# Altium PCB PCB.PcbDoc
Units mm, origin at the board's own origin, x right, y up, seen from the top; angles counter-clockwise.
Board outline 200 x 100 mm, 2 copper layers (Top Layer, Bottom Layer); 76 components, 73 nets, 347 pads, 74 vias.
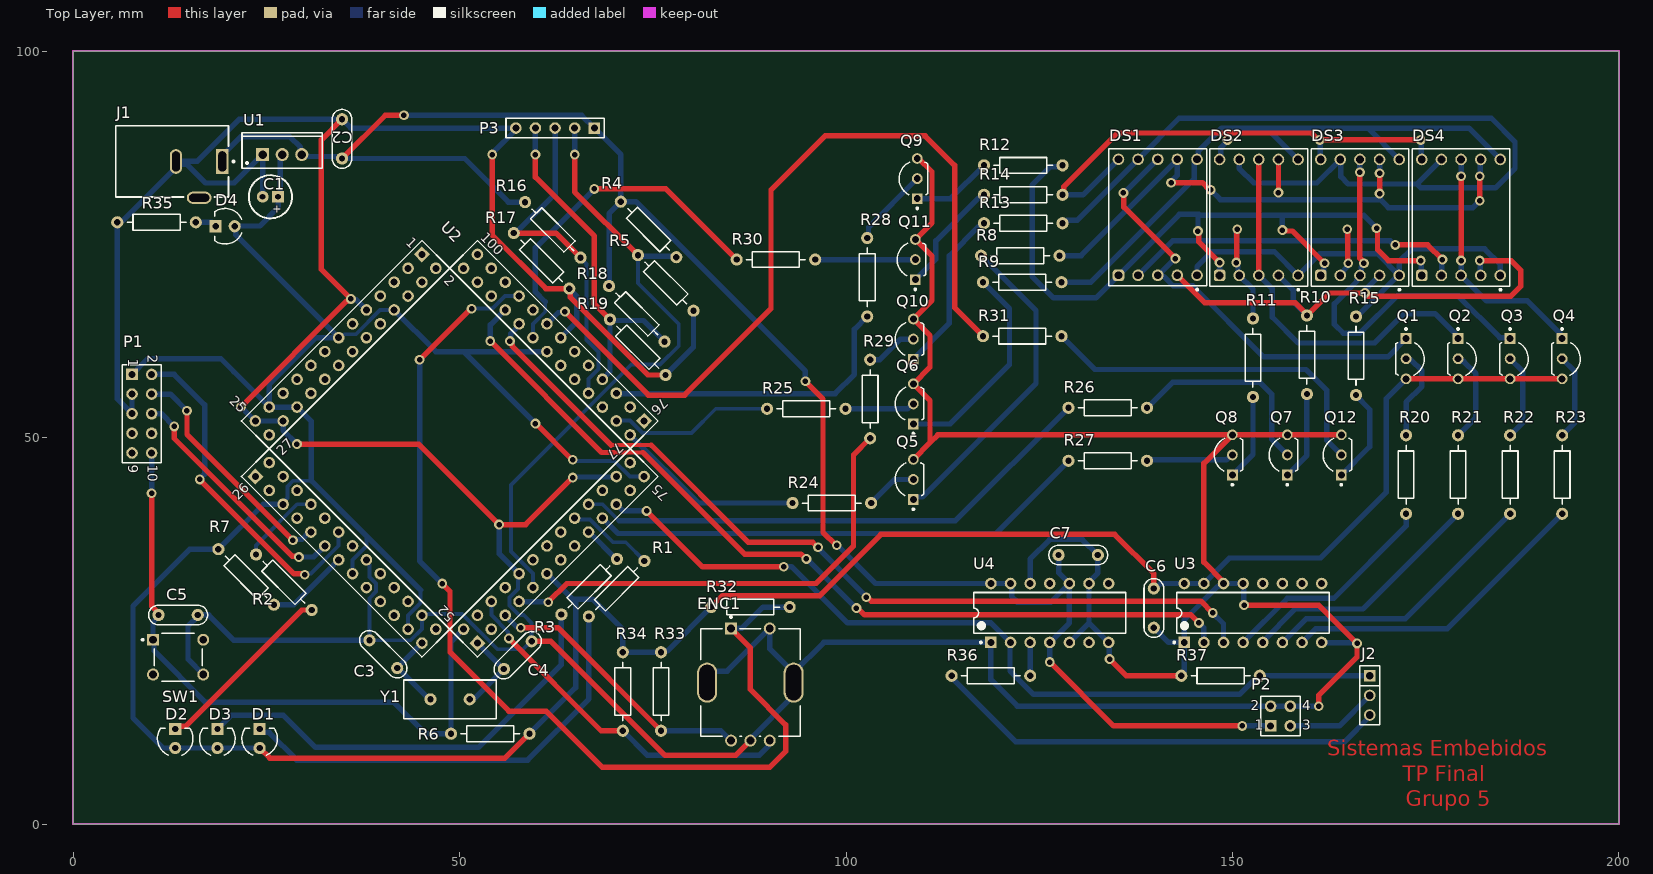
[diagram p0: Top Layer view]
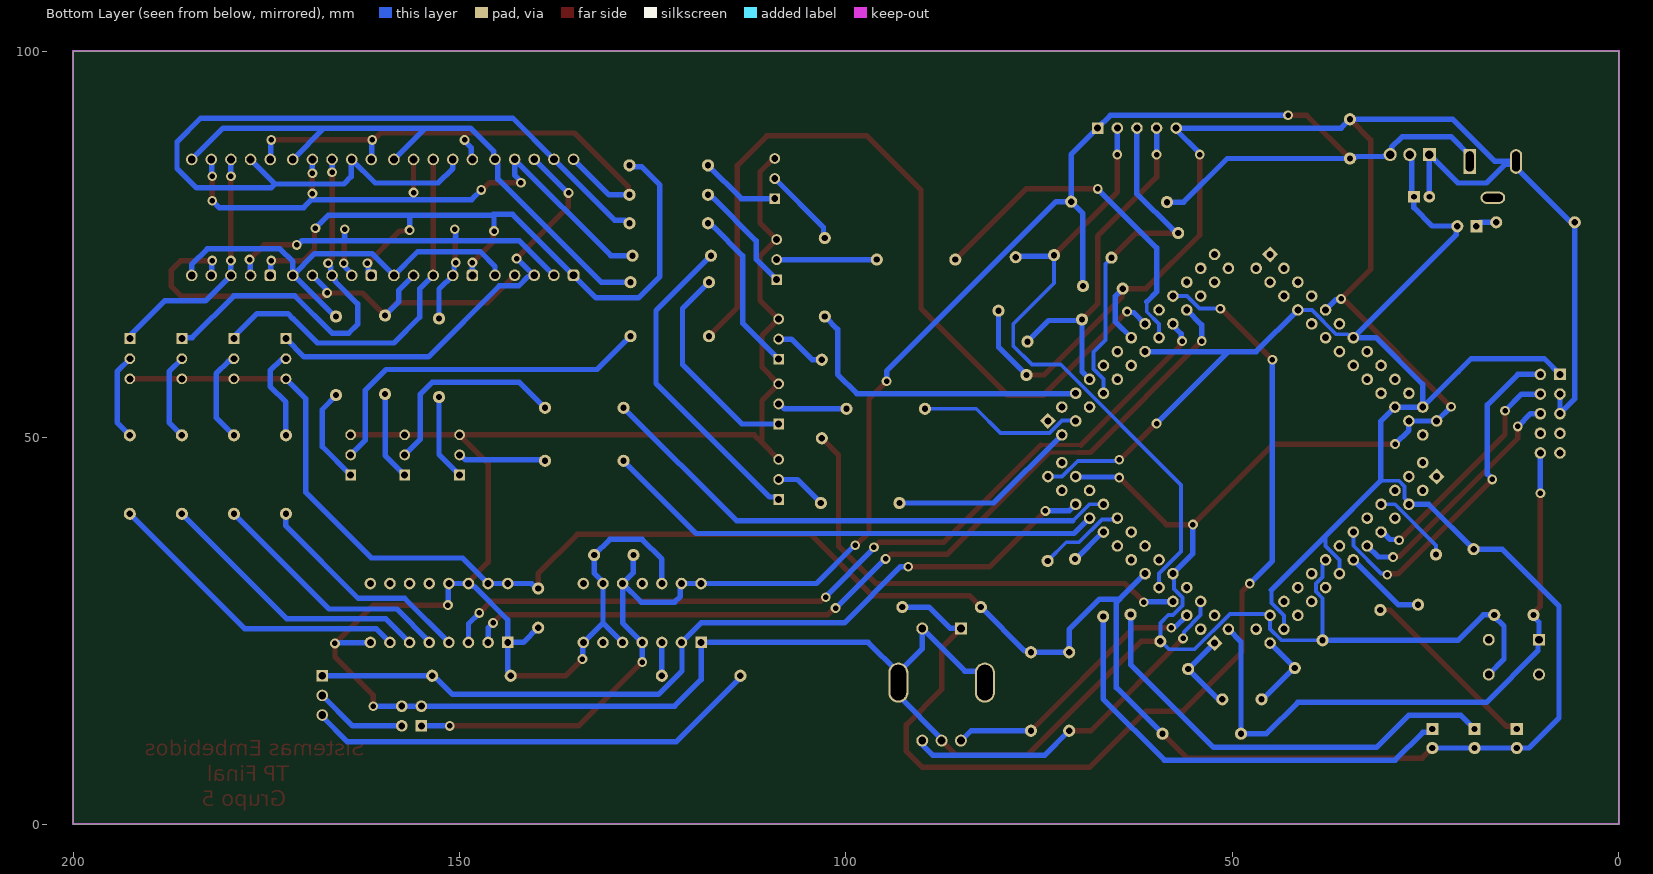
[diagram p1: Bottom Layer view, seen from below]
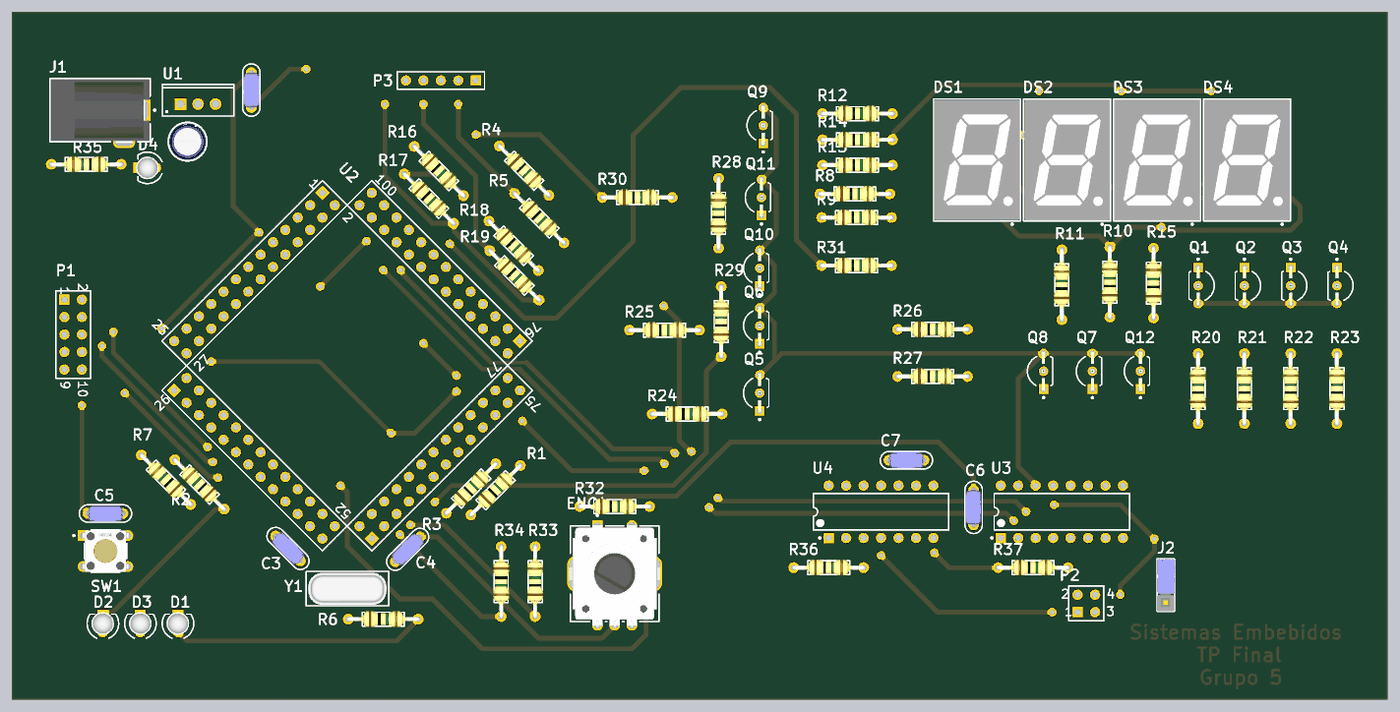
[diagram p2: 3D render of the assembled board from above, using the file's embedded part models]

## Layer stack, top to bottom
Top Solder: solder mask 0.0102, Solder Resist, Dk 3.5
Top Layer: signal copper 0.0356
Dielectric 1: dielectric 0.32, FR-4, Dk 4.8
Bottom Layer: signal copper 0.0356
Bottom Solder: solder mask 0.0102, Solder Resist, Dk 3.5

## Board outline
0,0 0,100 200,100 200,0

## Design rules (kind name [scope] priority, off if disabled: settings)
Clearance [All] p1: gap=0.25 ignorepadtopadclearanceinfootprint=FALSE
PolygonConnect [All] p1: connectstyle=Relief reliefconductorwidth=0.254 reliefentries=4 polygonreliefangle="90 Angle" airgapwidth=0.254
RoutingVias [All] p1: holewidth=0.711 width=1.27 viastyle="Through Hole" minholewidth=0.711 minwidth=1.27 maxholewidth=0.711 maxwidth=1.27
SolderMaskExpansion [All] p1: expansion=0.102 istentingtop=FALSE
Width [All] p1: maxlimit=1 minlimit=0.5 preferedwidth=0.7
30 further rules are at their usual default settings.

## Classes and differential pairs
component class Esquematico: C1 C2 C3 C4 C5 C7 D1 D2 D3 D4 ENC1 J1 J2 P1 P2 P3 R1 R2 R3 R4 R5 R6 R7 R16 R17 R18 R19 R34 R35 SW1 U1 U2 U4 Y1
component class Control_Acceso: DS1 DS2 DS3 DS4 Q1 Q2 Q3 Q4 Q5 Q6 Q7 Q8 Q9 Q10 Q11 Q12 R8 R9 R10 R11 R12 R13 R14 R15 R20 R21 R22 R23 R24 R25 R26 R27 R28 R29 R31 U3

## Components (designator, comment, footprint, x,y, rotation, side; value= is the part's Value field where it differs from the comment)
C1 "10uF" CAP100RP 25.527,81.153 r180 top
C2 "100nF" CAP200 34.798,88.646 r90 top
C3 "22pF" CAP200 40.132,21.971 r135 top
C4 "22pF" CAP200 57.531,21.844 r45 top
C5 "100nF" CAP200 13.589,27.051 r0 top
C6 "100nF" CAP200 139.827,27.94 r270 top
C7 "100nF" CAP200 130.048,34.798 r0 top
D1 "" LED3 24.13,11.049 r90 top
D2 "" LED3 13.208,11.049 r90 top
D3 "" LED3 18.669,11.049 r90 top
D4 "" LED3 19.685,77.343 r180 top
DS1 "" WL-T7DS_L17.5W12.4H7 140.335,78.493 r0 top
DS2 "" WL-T7DS_L17.5W12.4H7 153.416,78.479 r0 top
DS3 "" WL-T7DS_L17.5W12.4H7 166.497,78.479 r0 top
DS4 "" WL-T7DS_L17.5W12.4H7 179.578,78.479 r0 top
ENC1 "PEC12R-3217F-S0024" FP-PEC12R-3217F-S0024-MFG 87.63,18.295 r0 top
J1 "PJ-102A" FP-PJ-102A-MFG 12.804,85.725 r90 top
J2 "JUMPER" JUMPER3 167.767,16.637 r270 top
P1 "Header 5X2" HDR2X5 7.62,58.166 r270 top
P2 "Header 2X2" HDR2X2 154.94,12.7 r0 top
P3 "Header 5" HDR1X5 67.437,90.043 r180 top
Q1 "BC327" ONSC-TO-92-3-29-11_AM_BL 172.466,60.198 r270 top
Q2 "BC327" ONSC-TO-92-3-29-11_AM_BL 179.197,60.198 r270 top
Q3 "BC327" ONSC-TO-92-3-29-11_AM_BL 185.928,60.198 r270 top
Q4 "BC327" ONSC-TO-92-3-29-11_AM_BL 192.659,60.198 r270 top
Q5 "BC337" ONSC-TO-92-3-29-11_AM_BL 108.712,44.577 r90 top
Q6 "BC337" ONSC-TO-92-3-29-11_AM_BL 108.712,54.356 r90 top
Q7 "BC337" ONSC-TO-92-3-29-11_AM_BL 157.099,47.752 r90 top
Q8 "BC337" ONSC-TO-92-3-29-11_AM_BL 149.987,47.752 r90 top
Q9 "BC337" ONSC-TO-92-3-29-11_AM_BL 109.22,83.506 r90 top
Q10 "BC337" ONSC-TO-92-3-29-11_AM_BL 108.712,62.738 r90 top
Q11 "BC337" ONSC-TO-92-3-29-11_AM_BL 108.966,73.025 r90 top
Q12 "BC337" ONSC-TO-92-3-29-11_AM_BL 164.084,47.752 r90 top
R1 "330" RES400 66.73,26.852 r45 top
R2 "330" RES400 30.861,27.686 r135 top
R3 "330" RES400 63.174,27.106 r45 top
R4 "1k" RES400 70.866,80.518 r315 top
R5 "2.2k" RES400 73.08,73.605 r315 top
R6 "10k" RES400 48.895,11.684 r0 top
R7 "10k" RES400 25.98,28.376 r135 top
R8 "68" RES400 117.475,73.533 r0 top
R9 "68" RES400 117.729,70.104 r0 top
R10 "68" RES400 159.639,55.626 r90 top
R11 "68" RES400 152.654,55.245 r90 top
R12 "68" RES400 117.856,85.217 r0 top
R13 "68" RES400 117.856,77.724 r0 top
R14 "68" RES400 117.856,81.407 r0 top
R15 "68" RES400 165.989,55.499 r90 top
R16 "1k" RES400 58.475,80.463 r315 top
R17 "2.2k" RES400 57.023,76.454 r315 top
R18 "1k" RES400 69.342,69.596 r315 top
R19 "2.2k" RES400 69.469,65.278 r315 top
R20 "4.7K" RES400 172.466,40.132 r90 top
R21 "4.7K" RES400 179.197,40.133 r90 top
R22 "4.7K" RES400 185.928,40.132 r90 top
R23 "4.7K" RES400 192.659,40.132 r90 top
R24 "4.7K" RES400 93.091,41.529 r0 top
R25 "4.7K" RES400 89.789,53.721 r0 top
R26 "4.7K" RES400 128.778,53.848 r0 top
R27 "4.7K" RES400 128.778,46.99 r0 top
R28 "4.7K" RES400 102.743,65.659 r90 top
R29 "4.7K" RES400 103.124,49.911 r90 top
R30 "4.7K" RES400 85.852,73.025 r0 top
R31 "4.7K" RES400 117.729,63.119 r0 top
R32 "10k" RES400 82.55,28.067 r0 top
R33 "10k" RES400 76.073,12.065 r90 top
R34 "10k" RES400 71.12,22.225 r270 top
R35 "1k" RES400 15.875,77.851 r180 top
R36 "470" RES400 113.665,19.177 r0 top
R37 "4.7K" RES400 143.383,19.177 r0 top
SW1 "" FP-B3F-1055-MFG 13.589,21.59 r0 top
U1 "LD1117V33" TO220 27.051,86.614 r0 top
U2 "K64 Breakout Module" Breakout 49.008,48.673 r315 top
U3 "SN74HC139N" N0016A 152.654,27.305 r90 top
U4 "" N0014A 126.365,27.305 r90 top
Y1 "50MHz" "CRISTAL PERFIL" 46.228,16.129 r0 top

## Footprints (in the part's own frame and the unit in brackets; to place one, negate y for a bottom-side part, rotate by r counter-clockwise, add the part's x,y. Pads: shape width x height; smd on the part's side, far side on the other; paste and mask are expansions set on the pad)
Breakout [mm]
  rect 1.5x1.5 hole 0.9: 1(-20.433,14.954) 27(-15.353,-20.606) 53(20.207,-15.526) 79(15.127,20.034)
  round 1.5 hole 0.9: 2(-17.893,14.954) 3(-20.433,12.414) 4(-17.893,12.414) 5(-20.433,9.874) 6(-17.893,9.874) 7(-20.433,7.334) 8(-17.893,7.334) 9(-20.433,4.794) 10(-17.893,4.794) 11(-20.433,2.254) 12(-17.893,2.254) 13(-20.433,-0.286) 14(-17.893,-0.286) 15(-20.433,-2.826) 16(-17.893,-2.826) 17(-20.433,-5.366) 18(-17.893,-5.366) 19(-20.433,-7.906) 20(-17.893,-7.906) 21(-20.433,-10.446) 22(-17.893,-10.446) 23(-20.433,-12.986) 24(-17.893,-12.986) 25(-20.433,-15.526) 26(-17.893,-15.526) 28(-15.353,-18.066) 29(-12.813,-20.606) 30(-12.813,-18.066) 31(-10.273,-20.606) 32(-10.273,-18.066) 33(-7.733,-20.606) 34(-7.733,-18.066) 35(-5.193,-20.606) 36(-5.193,-18.066) 37(-2.653,-20.606) 38(-2.653,-18.066) 39(-0.113,-20.606) 40(-0.113,-18.066) 41(2.427,-20.606) 42(2.427,-18.066) 43(4.967,-20.606) 44(4.967,-18.066) 45(7.507,-20.606) 46(7.507,-18.066) 47(10.047,-20.606) 48(10.047,-18.066) 49(12.587,-20.606) 50(12.587,-18.066) 51(15.127,-20.606) 52(15.127,-18.066) 54(17.667,-15.526) 55(20.207,-12.986) 56(17.667,-12.986) 57(20.207,-10.446) 58(17.667,-10.446) 59(20.207,-7.906) 60(17.667,-7.906) 61(20.207,-5.366) 62(17.667,-5.366) 63(20.207,-2.826) 64(17.667,-2.826) 65(20.207,-0.286) 66(17.667,-0.286) 67(20.207,2.254) 68(17.667,2.254) 69(20.207,4.794) 70(17.667,4.794) 71(20.207,7.334) 72(17.667,7.334) 73(20.207,9.874) 74(17.667,9.874) 75(20.207,12.414) 76(17.667,12.414) 77(20.207,14.954) 78(17.667,14.954) 80(15.127,17.494) 81(12.587,20.034) 82(12.587,17.494) 83(10.047,20.034) 84(10.047,17.494) 85(7.507,20.034) 86(7.507,17.494) 87(4.967,20.034) 88(4.967,17.494) 89(2.427,20.034) 90(2.427,17.494) 91(-0.113,20.034) 92(-0.113,17.494) 93(-2.653,20.034) 94(-2.653,17.494) 95(-5.193,20.034) 96(-5.193,17.494) 97(-7.733,20.034) 98(-7.733,17.494) 99(-10.273,20.034) 100(-10.273,17.494) 101(-12.813,20.034) 102(-12.813,17.494) 103(-15.353,20.034) 104(-15.353,17.494)
  silkscreen extent -21.7,-21.88 21.48,21.3
CAP100RP [mil] "Body diameter 5mm"
  rect 60x60 hole 30: 1(-39.37,0)
  round 60 hole 30: 2(39.37,0)
  silkscreen extent -110,-110 110,110, body extent -99,-99 99,100, height 454
CAP200 [mil]
  round 62 hole 32: 1(-100,0) 2(100,0)
  silkscreen extent -150,-50 150,50, body extent -110,-46 110,44, height 246
"CRISTAL PERFIL" [mil]
  round 62 hole 32: 1(0,0) 2(200,0)
  silkscreen extent -136,-98 336,98, body extent -123,-93 323,90, height 138
FP-B3F-1055-MFG [mm]
  rect 1.55x1.55 hole 1 paste-2539.97 mask+0: 1(-3.25,2.25)
  round 1.55 hole 1 paste-2539.97 mask+0: 2(3.25,2.25) 3(-3.25,-2.25) 4(3.25,-2.25)
  silkscreen extent -4.72,-3.1 3.1,3.1, body extent -4.13,-3.2 4.13,3.2, height 0.25
FP-PEC12R-3217F-S0024-MFG [mm]
  rect 1.55x1.55 hole 1 paste-2539.97 mask+0: 1(-2.5,7)
  round 1.55 hole 1 paste-2539.97 mask+0: 2(2.5,7) A(-2.5,-7.5) B(2.5,-7.5) C(0,-7.5)
  rrect100% 2.6x5.2 hole 4.6 slot 2 at 0 deg paste-2539.97 mask+0: 3(-5.6,0) 4(5.6,0)
  silkscreen extent -6.45,-6.95 6.45,8.6, body extent -7,-8.37 7,7.88, height 0.25
FP-PJ-102A-MFG [mm]
  rect 3.2x1.6 hole 1 slot 2.6 at 0 deg paste-2539.97 mask+0: 1(0,-6.5)
  rrect100% 3.2x1.6 hole 1 slot 2.6 at 0 deg paste-2539.97 mask+0: 2(0,-0.5)
  rrect100% 1.6x3.2 hole 2.6 slot 1 at 0 deg paste-2539.97 mask+0: 3(-4.7,-3.5)
  silkscreen extent -4.6,-8.08 4.6,7.3, body extent -5.6,-7.4 4.7,7.4, height 0.25
HDR1X5 [mm] "Connector; Header; 5 Position"
  rect 1.5x1.5 hole 0.9: 1(0,0)
  round 1.5 hole 0.9: 2(2.54,0) 3(5.08,0) 4(7.62,0) 5(10.16,0)
  silkscreen extent -1.27,-1.27 11.43,1.27
HDR2X2 [mm] "Connector; Header; 2x2 Position"
  rect 1.5x1.5 hole 0.9: 1(0,0)
  round 1.5 hole 0.9: 2(0,2.54) 3(2.54,0) 4(2.54,2.54)
  silkscreen extent -1.27,-1.27 3.81,3.81
HDR2X5 [mm] "Connector; Header; 5x2 Position"
  rect 1.5x1.5 hole 0.9: 1(0,0)
  round 1.5 hole 0.9: 2(0,2.54) 3(2.54,0) 4(2.54,2.54) 5(5.08,0) 6(5.08,2.54) 7(7.62,0) 8(7.62,2.54) 9(10.16,0) 10(10.16,2.54)
  silkscreen extent -1.27,-1.27 11.43,3.81
JUMPER3 [mm]
  rect 1.5x1.5 hole 1.016: 1(-2.54,0)
  round 1.5 hole 1.016: 2(0,0) 3(2.54,0)
  silkscreen extent -3.81,-1.27 3.81,1.27, body extent -3.81,-1.3 3.81,1.27, height 16.15
LED3 [mil]
  round 62 hole 32: 1(-48,0)
  rect 62x62 hole 32: 2(49,0)
  silkscreen extent -84,-90 54,90, body extent -65,-64 65,65, height 19
N0014A [mm] "DIP, 14-Leads, Body 19.7x6.6mm, Pitch 2.54mm"
  rect 1.5x1.5 hole 0.9: 1(-3.81,7.62)
  round 1.5 hole 0.9: 2(-3.81,5.08) 3(-3.81,2.54) 4(-3.81,0) 5(-3.81,-2.54) 6(-3.81,-5.08) 7(-3.81,-7.62) 8(3.81,-7.62) 9(3.81,-5.08) 10(3.81,-2.54) 11(3.81,0) 12(3.81,2.54) 13(3.81,5.08) 14(3.81,7.62)
  silkscreen extent -3.93,-9.85 2.65,9.85, body extent -3.95,-9.85 3.95,9.85, height 5.08
N0016A [mm] "DIP, 16-Leads, Body 19.7x6.6mm, Pitch 2.54mm"
  rect 1.5x1.5 hole 0.9: 1(-3.81,8.89)
  round 1.5 hole 0.9: 2(-3.81,6.35) 3(-3.81,3.81) 4(-3.81,1.27) 5(-3.81,-1.27) 6(-3.81,-3.81) 7(-3.81,-6.35) 8(-3.81,-8.89) 9(3.81,-8.89) 10(3.81,-6.35) 11(3.81,-3.81) 12(3.81,-1.27) 13(3.81,1.27) 14(3.81,3.81) 15(3.81,6.35) 16(3.81,8.89)
  silkscreen extent -3.93,-9.85 2.65,10.31, body extent -3.95,-9.85 3.95,9.85, height 5.08
ONSC-TO-92-3-29-11_AM_BL [mm] "TO, 3-Leads, Body Dia 4.7mm, Pitch 2.6mm"
  rect 1.4x1.4 hole 0.9: 1(-2.6,0)
  round 1.4 hole 0.9: 2(0,0) 3(2.6,0)
  silkscreen extent -3.97,-1.34 2.13,2.35, body extent -2.84,-1.34 2.84,2.35, height 5.33
RES400 [mil]
  round 62 hole 32: 1(0,0) 2(400,0)
  silkscreen extent 50,-40 350,40, body extent -12,-45 412,46, height 96
TO220 [mm] "TO, Thru-Hole, Vertical, Heatsink Mounted; 3 In-Line Leads; Pitch 2.54 mm"
  rect 1.7x1.7 hole 1.1: 1(-2.54,0)
  round 1.7 hole 1.1: 2(0,0) 3(2.54,0)
  silkscreen extent -5.2,-1.75 5.2,2.85, body extent -5.25,-1.8 5.25,2.9, height 19.7
WL-T7DS_L17.5W12.4H7 [mm] "7 Segments Display THT Single Digit , body 12.4x17.5mm"
  rrect50% 1.5x1.5 hole 1: 1(-5.08,-7.5)
  round 1.5 hole 1: 2(-2.54,-7.5) 3(0,-7.5) 4(2.54,-7.5) 5(5.08,-7.5) 6(5.08,7.5) 7(2.54,7.5) 8(0,7.5) 9(-2.54,7.5) 10(-5.08,7.5)
  silkscreen extent -6.32,-9.47 6.32,8.87, body extent -6.2,-8.75 6.2,8.75, height 7.1

## Part data
C1: library part CAPPOL
C2 C3 C4 C5 C6 C7: library part CAP
D1 D2 D3 D4: library part LED
DS1 DS2 DS3 DS4: library part CMP-03913-119893999-3, "7-Seg Display, Comm Anode, Super Red Rohs Compliant: Yes", Forward Current=100mA, Forward Voltage=2V, Max Operating Temperature=85°C, Max Reverse Voltage (DC)=5V, Min Operating Temperature=-40°C, Dominant Wavelength=635nm, Height=7mm, Length=17.5mm, Luminous Intensity=20mcd, RoHS=Compliant, Width=12.4mm
ENC1: library part CMP-07421-000063-1, "ROTARY ENCODER", Height=13.4mm, Length=23mm, RoHS Compliant=Yes, Width=12.5mm
J1: library part CMP-12637-106234071-1, "PJ-102A 2.0 x 6.5 mm, 2.5 A, Horizontal, Through Hole, Tapered Pins, Dc Power Jack Connector", Color=Black, Current Rating=2.5A, Flammability Rating="UL94 V-0", Insulation Resistance=50MΩ, Max Operating Temperature=85°C, Min Operating Temperature=-25°C, Voltage Rating=24V, Contact Gender=Male, Contact Material="Copper, Nickel, Tin", Contact Plating=Nickel, Diameter=2.1mm, Gender=Male, Height=11.2mm, Housing Color=Black, Housing Material=Thermoplastic, Inside Diameter=2mm, Lead Free="Lead Free", Lifecycle Status=Production, Mount="Through Hole", NexarPartId=106234071, Number of Conductors=2, Number of Contacts=3, Orientation=Horizontal, Outside Diameter=6.5mm, Packaging=Bulk, RoHS=Compliant, Schedule B="8536695050, 8536695050", Shielding=No, Termination="Through Hole", Voltage Rating (DC)=24V
J2: library part JUMPER3
P1: "Header, 5-Pin, Dual row", LatestRevisionDate=17-Jul-2002, LatestRevisionNote="Re-released for DXP Platform.", Publisher="Altium Limited"
P2: "Header, 2-Pin, Dual row", LatestRevisionDate=17-Jul-2002, LatestRevisionNote="Re-released for DXP Platform.", Publisher="Altium Limited"
P3: "Header, 5-Pin", LatestRevisionDate=17-Jul-2002, LatestRevisionNote="Re-released for DXP Platform.", Publisher="Altium Limited"
Q1 Q2 Q3 Q4: library part CMP-1048-01577-1, "Amplifier Transistor, PNP Silicon, 3-Pin TO-92, Pb-Free, Ammo Box", Manufacturer="On Semiconductor", PartNumber=BC327-25ZL1G, ComponentLink1Description="Manufacturer URL", ComponentLink1URL=http://www.onsemi.com/, ComponentLink2Description=Datasheet, ComponentLink2URL=http://www.onsemi.com/pub_link/Collateral/BC327-D.PDF, ComponentLink3Description="Package Specification", ComponentLink3URL=http://www.onsemi.com/pub_link/Collateral/MAC97-D.PDF, DatasheetVersion="Rev. 6", IC Continuous (A)=-0.8, Mounting Technology="Through Hole", PackageDescription="3-Pin Transistor Outline, Body 4.825 x 3.685 mm, Pitch 1.27 mm", PackageReference=TO-92-3-29-11_AM_BL, PackageVersion="Rev. AM", Packing="Ammo Box", Polarity=PNP, RoHS=TRUE
Q5 Q6 Q7 Q8 Q9 Q10 Q11 Q12: library part CMP-1048-01583-1, "Amplifier Transistor, NPN Silicon, 3-Pin TO-92, Pb-Free, Ammo Box", Manufacturer="On Semiconductor", PartNumber=BC337-40ZL1G, ComponentLink1Description="Manufacturer URL", ComponentLink1URL=http://www.onsemi.com/, ComponentLink2Description=Datasheet, ComponentLink2URL=http://www.onsemi.com/pub_link/Collateral/BC337-D.PDF, ComponentLink3Description="Package Specification", ComponentLink3URL=http://www.onsemi.com/pub_link/Collateral/MAC97-D.PDF, DatasheetVersion="Rev. 8", IC Continuous (A)=0.8, Mounting Technology="Through Hole", PackageDescription="3-Pin Transistor Outline, Body 4.825 x 3.685 mm, Pitch 1.27 mm", PackageReference=TO-92-3-29-11_AM_BL, PackageVersion="Rev. AM", Packing="Ammo Box", Polarity=NPN, RoHS=TRUE
R1 R2 R3 R4 R5 R6 R7 R8 R9 R10 R11 R12 R13 R14 R15 R16 R17 R18 R19 R20 R21 R22 R23 R24 R25 R26 R27 R28 R29 R30 R31 R32 R33 R34 R35 R36 R37: library part RES
SW1: library part CMP-08834-000061-1, "SWITCH TACTILE SPST-NO 0.05A 24V", Actuator Color=Orange, Contact Current Rating=50mA, Contact Resistance=100mR, Max Operating Temperature=70°C, Max Voltage Rating (DC)=24V, Min Operating Temperature=-25°C, Operating Force=2.55N, Package Quantity=1500, Actuator Length=3mm, Contact Material=Gold, Contact Plating=Silver, Contact Type="1 maker", Current Rating=50mA, Depth=6mm, Electrical Life=300000Cycles, Height=7.3mm, Illumination Type=Non-Illuminated, Lead Free="Lead Free", Length=6mm, Max Current Rating=50mA, Mechanical Life=100000Cycles, Mount="Through Hole", Number of Poles=1, Orientation=Straight, Packaging=Bag, RoHS Compliant=Yes, Series=B3F, Switch Function=Off-Mom, Switch Travel=0.25mm, Termination="PC Pins", Throw Configuration=SPST, Voltage Rating (DC)=24V, Weight=0.25g, Width=6mm
U1: library part CMP-0244-00470-1, "Fixed Low Drop Positive Voltage Regulator, 3.3V, 3-Pin TO-220", ComponentLink1Description="Manufacturer URL", ComponentLink1URL=http://www.st.com, ComponentLink2Description=Datasheet, ComponentLink2URL=http://www.st.com/internet/com/TECHNICAL_RESOURCES/TECHNICAL_LITERATURE/DATASHEET/CD00000544.pdf, ComponentLink3Description="Package Specification", ComponentLink3URL=http://www.st.com/internet/com/TECHNICAL_RESOURCES/TECHNICAL_LITERATURE/PACKAGE_INFORMATION/CD00004649.pdf, DatasheetVersion=1/11/2011, PackageDescription="TO, Thru-Hole, Vertical, Heatsink Mounted; 3 In-Line Leads; Pitch 2.54 mm", PackageReference=TO220, PackageVersion=ver3.0
U2: library part Breakout
U3: library part CMP-1633-00660-2, "Dual 2-Line To 4-Line Decoders/Demultiplexers, N0016A, TUBE", F @ Nom Voltage(Max)(Mhz)=28, Generic Part Number=SN74HC139, ICC @ Nom Voltage(Max)(mA)=0.08, Manufacturer="Texas Instruments", Operating Temperature Range(C)="-40 to 85", Rating=Catalog, tpd @ Nom Voltage(Max)(ns)=44, Voltage(Nom)(V)=3.3,5, Bits(#)=4, Channels(#)=2, Code_JEDEC=MS-001, Configuration=2：4, DatasheetVersion=SCLS108D, Function=Decoder/Demultiplexer, Input Type=LVTTL/CMOS, Output Drive (IOL/IOH)(Max)(mA)=5.2/-5.2, Output Type=CMOS, PackageReference=N0016A, Schmitt Trigger=No, Technology Family=HC, Type=Standard, VCC(Max)(V)=6, VCC(Min)(V)=2
U4: library part CMP-0440-00135-3, "Quadruple Bus Buffer Gates With 3-State Outputs, N0014A, TUBE", F @ Nom Voltage(Max)(Mhz)=28, Generic Part Number=SN74HC125, ICC @ Nom Voltage(Max)(mA)=0.16, Manufacturer="Texas Instruments", Operating Temperature Range(C)="-40 to 85", Rating=Catalog, tpd @ Nom Voltage(Max)(ns)=26, Voltage(Nom)(V)=6, Bits(#)=4, Code_JEDEC=MS-001, DatasheetVersion=SCLS104D, Input Type=CMOS, Output Type=CMOS, PackageReference=N0014A, PackageVersion=http://www.ti.com/lit/ml/mpdi002c/mpdi002c.pdf, VCC(Max)(V)=6, VCC(Min)(V)=2
Y1: library part CRISTAL

## Via types
v1: diameter 1.27, hole 0.711, Top Layer to Bottom Layer, 74 vias

## Nets (pads, with @x,y where several pads share a name; then routed paths per layer and width w, separated by ;. In a path a pad name is that pad's centre, name@x,y a point inside that pad or via, vN(x,y) a via of type N, cw(c..) or ccw(c..) an arc to the next point about the centre after c; other vN are vias at no path point)
3V3: C1.1 C6.1 D1.1 D2.1 D3.1 D4.1 P1.1 Q1.3 Q2.3 Q3.3 Q4.3 R6.2 R7.2 R32.1 R33.2 R34.1 U1.2 U2.8 U2.13 U2.22 U2.23 U2.31 U2.41 U2.49 U2.63 U2.77 U2.92 U3.15 U3.16 | length 461.5
  Top Layer w0.7: D1.1 25.451,8.509 55.88,8.509 R6.2 ; v1(59.817,51.816) 59.88,51.816 64.579,47.117 v1(64.643,47.117) ; R32.1 84.035,29.552 96.608,29.552 104.521,37.465 134.747,37.465 139.827,32.385 C6.1 ; Q1.3 Q2.3 Q3.3 Q4.3
  Bottom Layer w0.5: U2.31 27.173,41.637 27.719,42.183 27.719,43.68 28.452,44.413 30.824,44.413 ; U2.13 34.628,62.919 35.082,63.373 36.579,63.373 39.717,66.511 U2.8 ; U2.41 36.154,34.154 37.973,35.973 37.973,37.263 ; U2.49 43.338,26.97 44.958,28.59 44.958,30.278 ; v1(64.643,47.117) 64.77,46.99 70.015,46.99 72.046,44.959 73.618,44.959 U2.77@73.744,45.085
  Bottom Layer w0.7: P1.1 9.652,60.198 19.118,60.198 20.802,58.514 U2.23 ; D1.1 D3.1 D2.1 11.633,9.83 7.747,13.716 7.747,28.194 15.113,35.56 R7.2 24.602,41.366 U2.31 ; U1.2 27.051,86.343 26.797,86.089 26.797,81.423 C1.1 26.527,79.74 24.155,77.368 20.929,77.368 D4.1 21.018,77.229 21.018,76.258 U2.13 31.423,62.919 25.377,56.873 U2.23 ; U2.8 46.93,61.123 50.51,61.123 ; 44.958,30.278 37.973,37.263 30.824,44.413 30.824,52.085 U2.22 U2.23 ; R6.2 65.024,17.653 65.024,28.66 64.601,29.083 ; v1(59.817,51.816) 50.51,61.123 ; U2.63 64.601,29.083 ; U2.92 50.51,61.123 ; U2.77@73.744,45.085 U2.77 ; R32.1 76.875,22.392 76.24,22.392 R33.2 R34.1 71.12,25.146 67.183,29.083 64.601,29.083 ; C6.1 140.039,30.48 140.674,31.115 U3.16 U3.15 149.606,34.417 161.417,34.417 169.926,42.926 169.926,55.058 Q1.3
5V: C2.1 C7.1 J1.1 P2.1 P3.1 R4.1 R16.1 R18.1 U1.3 U4.4 U4.10 U4.13 U4.14 | length 242.8
  Top Layer w0.7: C2.1 40.386,91.694 v1(42.799,91.694) ; v1(94.742,57.277) 97.028,54.991 97.028,37.719 98.679,36.068 v1(98.806,36.068) ; v1@126.305,20.955 v1(126.365,20.955) 134.62,12.7 v1(151.257,12.7)
  Bottom Layer w0.7: J1.1 19.304,86.525 21.679,88.9 28.067,88.9 29.4,87.567 29.4,86.805 U1.3 29.782,86.423 30.438,86.423 30.501,86.36 33.951,86.36 34.037,86.273 34.631,86.273 C2.1 50.673,86.106 56.316,80.463 R16.1 ; v1(42.799,91.694) 65.786,91.694 P3.1 70.866,86.614 R4.1 ; R18.1 69.342,78.994 R4.1 ; v1(94.742,57.277) 94.742,58.604 72.828,80.518 R4.1 ; v1(98.806,36.068) 98.87,36.068 103.822,31.115 U4.13 121.438,30.962 121.438,29.438 122.174,28.702 126.492,28.702 U4.10 ; v1(126.365,20.955) U4.4 128.905,26.035 U4.10 ; C7.1 127.508,32.512 U4.10 ; v1(151.257,12.7) P2.1
A: R24.1 U2.80 | length 24.7
  Bottom Layer w0.7: U2.80 80.892,41.529 R24.1
Ac: Q5.1 R8.1 | length 41.6
  Bottom Layer w0.7: Q5.1 109.04,42.305 109.869,42.305 124.587,57.023 124.587,66.421 R8.1
B: R25.1 U2.82 | length 21.5
  Bottom Layer w0.5: U2.82@70.333,52.197 72.049,52.197 73.663,50.582 80.011,50.582 83.15,53.721 R25.1
  Bottom Layer w0.7: U2.82 U2.82@70.333,52.197
Bc: Q6.1 R9.1 | length 27.7
  Bottom Layer w0.7: Q6.1 113.478,51.756 121.158,59.436 121.158,66.675 R9.1
C: R26.1 U2.72 | length 69
  Bottom Layer w0.5: U2.72 68.511,41.366 70.634,39.243
  Bottom Layer w0.7: 70.634,39.243 114.173,39.243 R26.1
Cc: Q7.1 R10.1 | length 11.5
  Bottom Layer w0.7: Q7.1 159.639,47.692 R10.1
CLK: P3.3 R16.2 R17.1 U2.86 | length 44.9
  Top Layer w0.7: R17.1 62.484,76.454 R16.2
  Bottom Layer w0.5: R16.2 65.659,73.211 66.421,72.449 66.421,62.611 67.984,61.048 67.984,58.857 66.686,57.559 U2.86
  Bottom Layer w0.7: R17.1 57.26,76.454 57.697,76.891 57.714,76.891 62.357,81.534 P3.3
D: R27.1 U2.71 | length 65
  Bottom Layer w0.7: U2.71 68.517,39.57 70.495,37.592 119.38,37.592 R27.1
DATA: P3.2 R4.2 R5.1 U2.61 | length 82.5
  Top Layer w0.7: v1(64.897,86.614) 64.897,81.788 R5.1
  Bottom Layer w0.5: U2.61 59.502,32.414 56.642,35.275 56.642,43.866 72.212,59.436 75.946,59.436 78.359,61.849 78.359,64.684 73.08,69.963 R5.1
  Bottom Layer w0.7: v1(64.897,86.614) P3.2 ; R5.1 73.215,73.469 77.915,73.469 R4.2
Data_M: J2.2 P2.3 | length 11.9
  Bottom Layer w0.7: P2.3 163.83,12.7 J2.2
Dc: Q8.1 R11.1 | length 11.2
  Bottom Layer w0.7: Q8.1 152.654,47.819 R11.1
DIG0: R20.1 U3.4 | length 28.9
  Bottom Layer w0.7: U3.4 157.099,29.21 163.115,29.21 172.466,38.561 R20.1
DIG1: R21.1 U3.5 | length 32.2
  Bottom Layer w0.7: U3.5 153.924,23.622 158.115,27.813 166.877,27.813 R21.1
DIG2: R22.1 U3.6 | length 36.4
  Bottom Layer w0.7: U3.6 159.512,26.543 172.339,26.543 R22.1
DIG3: R23.1 U3.7 | length 40.5
  Bottom Layer w0.7: U3.7 160.782,25.273 177.8,25.273 R23.1
Dout: J2.1 R37.2 U2.73 U4.2 | length 110.9
  Top Layer w0.7: v1(74.2,40.513) 81.439,33.274 v1(91.948,33.274)
  Bottom Layer w0.7: U2.73 71.132,40.513 v1@74.199,40.513 ; v1(91.948,33.274) 91.965,33.291 92.947,33.291 100.203,26.035 118.745,26.035 U4.2 121.221,23.431 121.221,19.818 124.276,16.764 150.893,16.764 153.306,19.177 R37.2 J2.1
DP: R31.1 U2.93 | length 106
  Top Layer w0.7: v1(63.627,66.294) 74.422,55.499 79.121,55.499 90.297,66.675 90.297,82.042 97.282,89.027 110.236,89.027 114.046,85.217 114.046,66.802 R31.1
  Bottom Layer w0.7: U2.93 62.768,66.185 63.518,66.185 v1(63.627,66.294)
DPc: Q12.1 R15.1 | length 12.6
  Bottom Layer w0.7: Q12.1 167.767,48.835 167.767,53.636 165.989,55.414 R15.1
E: R28.1 U2.83 | length 40
  Bottom Layer w0.7: U2.83 70.333,55.68 98.606,55.68 101.092,58.166 101.092,64.008 R28.1
Ec: Q9.1 R12.1 | length 10.4
  Bottom Layer w0.7: Q9.1 113.545,80.906 R12.1
ENA: P3.4 R18.2 R19.1 U2.85 | length 45
  Top Layer w0.7: v1(59.817,86.614) 59.817,83.693 67.437,76.073 67.437,67.31 R19.1
  Bottom Layer w0.7: v1(59.817,86.614) P3.4 ; U2.85 69.469,58.518 R19.1 ; R19.1@69.596,65.151 73.787,65.151 R18.2
EXTAL0: C3.1 U2.51 Y1.1 | length 10.5
  Bottom Layer w0.7: U2.51 45.134,23.393 41.928,20.188 C3.1 42.055,20.175 46.101,16.129 Y1.1
F: R29.1 U2.59 | length 61.2
  Top Layer w0.7: v1(61.468,28.702) 63.881,31.115 96.139,31.115 100.965,35.941 100.965,47.752 R29.1
  Bottom Layer w0.7: U2.59 57.752,28.748 61.422,28.748 v1(61.468,28.702)
Fc: Q10.1 R13.1 | length 21.5
  Bottom Layer w0.7: Q10.1 113.375,64.801 113.375,73.497 117.165,77.287 117.182,77.287 117.619,77.724 R13.1
G: R30.1 U2.94 | length 45.8
  Top Layer w0.7: v1(67.437,82.169) 76.708,82.169 R30.1
  Bottom Layer w0.5: U2.94 59.502,64.687 61.087,66.272 61.087,67.564
  Bottom Layer w0.7: 61.087,67.564 59.817,68.834 59.817,74.549 v1(67.437,82.169)
Gc: Q11.1 R14.1 | length 14.8
  Bottom Layer w0.7: Q11.1 111.633,73.092 111.633,75.438 117.165,80.97 117.182,80.97 117.619,81.407 R14.1
GND: C1.2 C2.2 C3.2 C4.2 C5.2 C6.2 C7.2 ENC1.2 ENC1.3 ENC1.4 ENC1.C J1.2 P1.3 P1.5 P2.2 P2.4 P3.5 Q5.3 Q6.3 Q7.3 Q8.3 Q9.3 Q10.3 Q11.3 Q12.3 R5.2 R17.2 R19.2 R35.2 R37.1 SW1.4 U1.1 U2.9 U2.24 U2.25 U2.42 U2.50 U2.62 U2.76 U2.91 U3.1 U3.8 U3.13 U3.14 U4.1 U4.5 U4.7 U4.9 U4.12 | length 724.1
  Top Layer w0.7: v1(21.717,53.975) 35.402,67.66 v1@35.502,67.66 ; C1.2 C1.2@24.685,80.995 ; v1(28.956,49.149) 44.704,49.149 v1(55.118,38.735) 58.547,38.735 v1(64.643,44.831) ; C2.2 32.131,88.519 32.131,71.755 v1(35.941,67.945) ; v1(54.229,86.614) 54.229,76.2 61.159,69.27 R17.2 64.298,69.179 64.298,68.163 74.367,58.094 R19.2 ; C4.2 61.831,23.64 76.581,8.89 85.725,8.89 ENC1.C ; Q5.3 110.871,49.336 ; Q9.3 109.409,86.106 111.125,84.39 111.125,77.784 Q11.3 111.125,73.466 111.125,67.751 Q10.3 110.871,63.179 110.871,59.115 Q6.3 110.871,54.797 110.871,49.336 ; C7.2 C7.2@132.755,34.965 ; v1(134.112,21.336) 136.271,19.177 R37.1 ; U3.14 148.844,31.331 146.304,33.871 146.304,46.669 Q8.3 ; v1(151.511,28.321) 161.163,28.321 v1(166.116,23.368) 166.116,21.59 161.163,16.637 v1(161.163,15.24) ; Q12.3@164.207,50.229 Q12.3 Q7.3 Q8.3 ; 110.871,49.336 111.887,50.352 Q8.3
  Bottom Layer w0.5: U2.42 37.95,33.912 38.336,33.525 38.336,31.972 39.2,31.108 39.2,30.072 38.336,29.209 C3.2 43.671,23.767 45.134,25.23 U2.50 45.314,27.178 50.314,27.178 54.886,22.606 58.187,22.606 59.221,23.64 C4.2 59.327,26.017 58.308,27.036 57.696,27.036 56.456,28.276 56.456,29.312 57.553,30.409 U2.62@57.553,32.233
  Bottom Layer w0.7: P1.3 P1.5 5.715,54.991 R35.2 5.882,78.018 6.397,78.018 13.304,84.925 J1.2 ; SW1.4 14.859,21.32 14.859,25.599 16.129,26.869 C5.2 17.526,27.051 20.81,23.767 C3.2 ; v1(21.717,53.975) 21.733,53.975 23.565,52.143 U2.25 U2.24 27.173,50.932 v1(28.956,49.149) ; C1.2 24.519,81.161 24.519,86.606 U1.1 20.828,82.931 17.145,82.931 14.744,85.332 13.697,85.332 J1.2 ; v1(35.941,67.945) 36.05,67.836 36.625,67.836 U2.9 ; v1(54.229,86.614) 54.338,86.723 54.338,86.888 57.277,89.827 P3.5 35.941,90.043 C2.2 21.516,91.186 16.055,85.725 J1.2 ; v1(55.118,38.735) 55.118,34.974 U2.62 U2.62@57.553,32.233 ; U2.91 65.151,64.976 65.151,68.295 64.207,69.239 R17.2 ; v1(64.643,44.831) 64.707,44.895 70.215,44.895 U2.76 ; R19.2 80.264,61.705 R5.2 ; ENC1.3 82.03,18.897 82.908,19.775 84.61,19.775 ENC1.2 90.13,22.695 ENC1.4@93.23,19.595 ; ENC1.C 87.63,11.025 93.23,16.625 ENC1.4 ENC1.4@93.23,19.595 ; Q5.3 Q5.3@108.846,47.311 ; U4.12 123.825,34.29 126.365,36.83 130.556,36.83 C7.2 132.588,32.474 131.445,31.331 U4.9 131.445,26.035 ; U4.5 131.445,26.035 ; v1(134.112,21.336) 134.048,21.399 134.048,23.431 U4.7 131.445,26.035 ; C6.2 141.732,23.495 U3.1 ; R37.1 143.383,19.414 143.764,19.795 U3.1 ; v1(151.511,28.321) 151.447,28.384 151.447,31.051 U3.13 U3.14 148.628,31.115 148.245,30.733 148.081,30.733 143.764,26.416 U3.1 ; v1(161.163,15.24) P2.4 P2.2 122.174,15.24 118.745,18.669 U4.1 97.13,23.495 ENC1.4@93.23,19.595 ; U3.8 161.607,23.431 166.052,23.431 v1(166.116,23.368)
LED_B: R3.2 U2.69 | length 5.1
  Top Layer w0.7: U2.69 U2.69@66.78,37.774 ; R3.2@70.264,34.29 R3.2
  Bottom Layer w0.7: U2.69@66.78,37.774 R3.2@70.264,34.29
LED_G: R2.2 U2.34 | length 10.5
  Bottom Layer w0.5: R2.2 23.677,36.052 28.992,41.366 U2.34
LED_R: R1.2 U2.70 | length 11.3
  Bottom Layer w0.5: U2.70@65.043,39.417 66.868,39.417 69.836,36.449 71.501,36.449 R1.2
  Bottom Layer w0.7: U2.70 U2.70@65.043,39.417
NetD1_2: D1.2 R1.1 | length 58.2
  Bottom Layer w0.7: D1.2 24.566,11.857 25.354,11.857 28.956,8.255 58.801,8.255 66.73,16.184 R1.1
NetD2_2: D2.2 R2.1 | length 24
  Top Layer w0.7: D2.2 13.543,12.628 14.533,12.628 29.591,27.686 R2.1
NetD3_2: D3.2 R3.1 | length 57.9
  Bottom Layer w0.7: D3.2 20.472,14.097 27.178,14.097 31.369,9.906 52.451,9.906 63.174,20.629 R3.1
NetD4_2: D4.2 R35.1 | length 2.8
  Bottom Layer w0.7: R35.1 17.932,77.851 D4.2
NetDS1_1: DS1.1 DS2.1 DS3.1 DS4.1 R12.2 | length 98.9
  Top Layer w0.7: v1(145.542,76.708) 145.651,76.599 145.651,75.329 v1(148.336,72.644) ; v1(156.464,76.835) 156.573,76.726 157.751,76.726 v1(161.925,72.552) ; v1(168.656,77.089) 168.765,76.98 168.765,74.313 170.184,72.894 172.583,72.894 172.586,72.898 v1(174.371,72.898)
  Bottom Layer w0.7: R12.2 127.849,85.05 126.452,85.05 124.079,82.677 124.079,70.866 126.873,68.072 132.334,68.072 DS1.1 143.129,78.867 145.669,78.867 145.542,78.74 ; v1(145.542,76.708) 145.542,78.74 ; DS2.1 v1(148.336,72.644) ; v1(156.464,76.835) 156.464,78.549 156.273,78.74 ; DS3.1 161.802,71.364 161.802,72.274 161.925,72.398 v1(161.925,72.552) ; v1(168.656,77.089) 167.005,78.74 156.273,78.74 ; v1(174.371,72.898) 174.434,72.834 174.434,71.042 DS4.1 ; 145.542,78.74 156.273,78.74
NetDS1_2: DS1.2 DS2.2 DS3.2 DS4.2 R11.2 | length 66.4
  Top Layer w0.7: v1(150.495,72.644) 150.558,72.707 150.558,76.898 v1(150.622,76.962) ; v1(164.846,76.962) 164.909,76.898 164.909,72.615 v1(164.973,72.552) ; v1(171.069,74.93) 175.26,74.93 v1(177.165,73.025)
  Bottom Layer w0.7: DS1.2 142.24,75.438 150.368,75.438 ; v1(150.495,72.644) 150.495,72.49 150.723,72.262 150.723,71.132 DS2.2 152.654,69.201 R11.2 ; v1(150.622,76.962) 150.513,76.853 150.513,75.583 150.368,75.438 ; DS3.2 163.957,71.195 164.864,72.102 164.864,72.443 v1(164.973,72.552) ; v1(164.846,76.962) 164.846,75.438 ; v1(171.069,74.93) 170.915,74.93 170.407,75.438 164.846,75.438 ; DS4.2 177.101,71.042 177.101,72.962 v1(177.165,73.025) ; 150.368,75.438 164.846,75.438
NetDS1_3: DS1.3 DS1.8 Q1.1 | length 58.2
  Top Layer w0.7: v1(135.89,81.661) 135.951,81.6 135.951,79.822 v1(142.621,73.152)
  Bottom Layer w0.7: v1(135.89,81.661) 135.946,81.661 140.279,85.993 DS1.8 ; v1(142.621,73.152) 142.558,73.152 140.398,70.993 DS1.3 140.488,70.84 141.119,70.84 142.316,69.643 144.856,69.643 154.047,60.452 170.12,60.452 Q1.1
NetDS1_4: DS1.4 DS2.4 DS3.4 DS4.4 R10.2 | length 67.8
  Top Layer w0.7: DS1.4 146.431,67.437 158.142,67.437 R10.2@159.716,65.863 ; R10.2 R10.2@159.716,65.863 ; v1(167.132,68.707) 162.56,68.707 R10.2@159.716,65.863 ; v1@167.417,68.268 185.997,68.268 187.325,69.596 187.325,71.628 186.055,72.898 v1(181.991,72.898)
  Bottom Layer w0.7: DS2.4 157.879,69.056 157.879,67.546 R10.2 ; v1(167.132,68.707) 167.241,68.816 167.241,69.183 DS3.4 ; v1(181.991,72.898) 182.054,72.834 182.054,71.042 DS4.4
NetDS1_5: DS1.5 DS2.5 DS3.5 DS4.5 R15.2 | length 57.3
  Bottom Layer w0.7: DS1.5 145.416,70.994 145.416,72.137 147.32,74.041 155.434,74.041 DS2.5 161.304,73.787 168.769,73.787 DS3.5 ; R15.2 166.123,65.659 171.443,70.979 DS3.5 ; DS4.5 184.658,72.39 182.626,74.422 173.228,74.422 171.577,72.771 DS3.5
NetDS1_6: DS1.6 DS2.6 DS3.6 DS4.6 R9.2 | length 80
  Bottom Layer w0.7: R9.2 131.699,70.104 145.04,83.445 145.04,85.401 145.415,85.777 DS1.6 145.55,86.128 145.55,87.003 148.59,90.043 154.432,90.043 ; DS2.6 154.432,90.043 ; DS3.6 167.513,90.043 ; DS4.6 180.594,90.043 167.513,90.043 ; 154.432,90.043 167.513,90.043
NetDS1_7: DS1.7 DS2.7 DS3.7 DS4.7 R8.2 | length 81.2
  Top Layer w0.7: v1(142.065,82.979) 146.102,82.979 147.039,82.042 v1(147.193,82.042) ; v1(155.956,81.696) DS2.7 ; v1(169.037,81.569) v1(169.037,84.201) ; v1(181.991,80.645) v1(181.991,83.82)
  Bottom Layer w0.7: R8.2 130.415,73.533 DS1.7 142.875,83.943 142.065,83.133 v1(142.065,82.979) ; v1(147.193,82.042) 148.445,80.79 155.956,80.79 ; v1(155.956,81.696) 155.956,80.772 169.164,80.772 ; v1(169.037,81.569) 169.146,81.46 169.146,80.79 169.164,80.772 ; v1(169.037,84.201) DS3.7 ; v1(181.991,80.645) 181.102,79.756 170.18,79.756 169.164,80.772 ; v1(181.991,83.82) 182.054,83.883 182.054,85.915 DS4.7
NetDS1_9: DS1.9 DS2.9 DS3.9 DS4.9 R13.2 | length 116.1
  Bottom Layer w0.7: R13.2 128.253,77.724 128.634,78.105 129.907,78.105 DS1.9 143.115,91.313 183.515,91.313 186.563,88.265 186.563,84.836 184.023,82.296 174.371,82.296 173.863,82.804 ; DS2.9 150.877,85.978 150.877,84.835 152.781,82.931 160.909,82.931 DS3.9 164.022,85.914 164.022,83.755 164.973,82.804 173.863,82.804 ; DS4.9 173.863,82.804
NetDS1_10: DS1.10 DS2.10 DS3.10 DS4.10 R14.2 | length 68.7
  Top Layer w0.7: R14.2 128.183,81.574 128.183,82.463 135.128,89.408 149.342,89.408 ; v1(149.352,88.519) 149.342,88.529 149.342,89.408 ; v1(174.371,88.519) 161.136,88.519 160.247,89.408 149.342,89.408
  Bottom Layer w0.7: R14.2 130.669,81.407 DS1.10 ; DS2.10 148.489,86.132 148.489,87.502 149.352,88.365 v1(149.352,88.519) ; v1(161.29,88.519) 161.353,88.456 161.353,86.042 DS3.10 ; v1(174.371,88.519) 174.434,88.456 174.434,86.042 DS4.10
NetDS2_3: DS2.3 DS2.8 Q2.1 | length 49.6
  Top Layer w0.7: DS2.3 DS2.8
  Bottom Layer w0.7: DS2.3 155.159,69.236 155.159,65.567 158.496,62.23 168.402,62.23 171.166,64.994 171.166,65.017 171.517,65.368 171.54,65.368 172.212,66.04 176.209,66.04 Q2.1@179.324,62.925
NetDS3_3: DS3.3 DS3.8 Q3.1 | length 50.6
  Top Layer w0.7: v1(166.497,84.328) 166.497,73.214 167.005,72.706 v1(167.005,72.552)
  Bottom Layer w0.7: v1(166.497,84.328) DS3.8 ; v1(167.005,72.552) 167.005,72.398 166.65,72.043 166.65,71.132 DS3.3 166.497,70.763 166.108,70.373 166.108,70.223 163.195,67.31 163.195,64.643 164.338,63.5 166.497,63.5 171.323,68.326 179.197,68.326 184.588,62.935 185.791,62.935 Q3.1
NetDS4_3: DS4.3 DS4.8 Q4.1 | length 31.6
  Top Layer w0.7: v1(179.578,72.898) v1(179.578,83.82)
  Bottom Layer w0.7: v1(179.578,72.898) DS4.3 182.866,67.691 188.147,67.691 Q4.1@192.85,62.988 ; v1(179.578,83.82) DS4.8
NetJ2_3: J2.3 R36.1 | length 59.5
  Top Layer w0.7: R36.1 R36.1@113.792,19.05
  Bottom Layer w0.7: R36.1 113.665,18.94 121.937,10.668 164.554,10.668 167.767,13.881 J2.3
NetQ1_2: Q1.2 R20.2 | length 11.9
  Bottom Layer w0.7: R20.2 172.466,54.572 174.498,56.604 174.498,58.674 173.108,60.064 172.6,60.064 Q1.2
NetQ2_2: Q2.2 R21.2 | length 12.1
  Bottom Layer w0.7: R21.2@179.197,50.379 R21.2 181.483,52.579 181.483,58.293 179.925,59.851 179.733,59.851 179.386,60.198 Q2.2
NetQ3_2: Q3.2 R22.2 | length 11.3
  Bottom Layer w0.7: R22.2 187.579,51.943 187.579,58.547 Q3.2
NetQ4_2: Q4.2 R23.2 | length 11.3
  Bottom Layer w0.7: R23.2 194.31,51.943 194.31,58.547 Q4.2
NetQ5_2: Q5.2 R24.2 | length 7.1
  Bottom Layer w0.7: R24.2@103.378,41.402 R24.2 106.299,44.577 Q5.2 Q5.2@108.585,44.45
NetQ6_2: Q6.2 R25.2 | length 9
  Bottom Layer w0.7: R25.2 107.952,53.721 108.587,54.356 Q6.2
NetQ7_2: Q7.2 R26.2 | length 27
  Bottom Layer w0.7: R26.2 142.24,57.15 153.543,57.15 155.097,55.596 155.097,49.754 Q7.2 Q7.2@157.006,47.659
NetQ8_2: Q8.2 R27.2 | length 11.1
  Bottom Layer w0.7: R27.2@139.136,47.117 149.227,47.117 149.862,47.752 Q8.2
NetQ9_2: Q9.2 R28.2 | length 10.4
  Bottom Layer w0.7: R28.2 102.91,75.986 102.91,77.196 Q9.2
NetQ10_2: Q10.2 R29.2 | length 6.7
  Bottom Layer w0.7: R29.2 104.394,60.071 107.061,62.738 Q10.2
NetQ11_2: Q11.2 R30.2 | length 13
  Bottom Layer w0.7: R30.2 Q11.2
NetQ12_2: Q12.2 R31.2 | length 46.4
  Bottom Layer w0.7: R31.2 132.207,58.801 159.512,58.801 162.179,56.134 162.179,49.657 Q12.2
NetR36_2: R36.2 U4.3 | length 4.5
  Bottom Layer w0.7: R36.2@123.888,19.241 R36.2 U4.3 U4.3@123.888,23.431
NMI_B: R7.1 U2.39 | length 10.8
  Bottom Layer w0.7: R7.1 28.551,28.376 U2.39
OutA: ENC1.A R33.1 U2.57 | length 35.9
  Top Layer w0.7: v1(57.912,25.4) 62.738,25.4 R33.1
  Bottom Layer w0.7: U2.57 57.399,25.509 57.803,25.509 v1(57.912,25.4) ; R33.1 83.819,12.065 85.089,10.795 ENC1.A
OutB: ENC1.B R34.2 U2.58 | length 46.8
  Top Layer w0.7: v1(56.388,24.003) 68.326,12.065 R34.2
  Bottom Layer w0.5: U2.58 54.114,27.026 56.283,24.857 56.283,24.108 v1(56.388,24.003)
  Bottom Layer w0.7: R34.2 74.295,8.89 88.773,8.89 89.967,10.084 89.967,10.632 ENC1.B
RESET_B: C5.1 P1.10 R6.1 SW1.1 U2.54 | length 83.4
  Top Layer w0.7: v1(10.16,42.799) 10.16,28.177 11.049,27.288 C5.1
  Bottom Layer w0.7: v1(10.16,42.799) P1.10 ; C5.1 11.049,26.814 10.339,26.104 SW1.1 10.468,23.711 10.468,22.425 17.145,15.748 41.529,15.748 45.593,11.684 R6.1 48.895,23.575 U2.54
SEL0: U2.98 U3.2 | length 114.4
  Top Layer w0.5: 69.927,48.072 73.721,48.072
  Top Layer w0.7: v1(53.975,62.484) 68.387,48.072 69.927,48.072 ; 73.721,48.072 86.868,34.925 94.174,34.925 94.809,34.29 v1(94.869,34.29) ; v1(101.346,27.94) 101.5,27.94 102.389,27.051 144.626,27.051 v1(145.669,26.008)
  Bottom Layer w0.7: v1(53.975,62.484) 53.975,64.576 U2.98 ; v1(94.869,34.29) 94.932,34.29 101.282,27.94 v1(101.346,27.94) ; v1(145.669,26.008) 146.304,25.373 U3.2
SEL1: U2.96 U3.3 | length 113
  Top Layer w0.5: 69.596,49.022 74.803,49.022
  Top Layer w0.7: v1(56.515,62.484) 56.515,62.33 56.8,62.045 56.8,61.818 69.596,49.022 ; 74.803,49.022 87.376,36.449 95.698,36.449 96.333,35.814 v1(96.393,35.814) ; v1(102.616,29.337) 102.77,29.337 103.278,28.829 145.923,28.829 v1(147.447,27.305)
  Bottom Layer w0.7: v1(56.515,62.484) 56.624,62.593 56.624,63.417 57.706,64.499 U2.96 ; v1(96.393,35.814) 96.393,35.687 102.616,29.464 v1(102.616,29.337) ; v1(147.447,27.305) 148.844,25.908 U3.3
SW: ENC1.1 R32.2 U2.97 | length 133.8
  Top Layer w0.7: v1(44.831,60.071) 44.895,60.071 51.498,66.675 v1(51.562,66.675) ; v1(47.752,31.115) 48.768,30.099 48.768,22.225 56.388,14.605 61.214,14.605 68.453,7.366 90.17,7.366 92.202,9.398 92.202,12.827 87.63,17.399 87.63,22.795 ENC1.1
  Bottom Layer w0.5: v1(51.562,66.675) 54.25,66.675 55.901,68.326 U2.97@57.687,68.326
  Bottom Layer w0.7: v1(44.831,60.071) 44.831,34.036 v1(47.752,31.115) ; U2.97@57.687,68.326 U2.97 ; ENC1.1 85.166,25.331 86.545,25.331 89.281,28.067 R32.2
SWDCLK: P1.4 U2.35 | length 30.8
  Top Layer w0.7: P1.4@10.16,55.451 P1.4 ; v1(14.732,53.467) 14.732,50.419 v1(28.448,36.703)
  Bottom Layer w0.7: P1.4 12.573,55.626 v1(14.732,53.467) ; v1(28.448,36.703) 28.557,36.812 29.587,36.812 30.549,37.774 U2.35
SWDIO: P1.2 U2.38 | length 44.8
  Top Layer w0.7: v1(16.383,44.577) 28.593,32.367 29.863,32.367 v1(29.972,32.258)
  Bottom Layer w0.5: v1(29.972,32.258) 30.119,32.405 30.756,32.405 34.357,36.007 U2.38
  Bottom Layer w0.7: P1.2 13.081,58.166 17.018,54.229 17.018,45.272 16.383,44.637 v1(16.383,44.577)
SWDTRACE: P1.6 U2.37 | length 31.6
  Top Layer w0.7: v1(13.081,51.435) 13.081,49.911 28.339,34.653 29.101,34.653 v1(29.21,34.544)
  Bottom Layer w0.7: P1.6 11.43,53.086 v1(13.081,51.435) ; v1(29.21,34.544) 31.127,34.544 U2.37
XTAL0: C4.1 U2.53 Y1.2 | length 10.9
  Bottom Layer w0.7: Y1.2 51.475,16.296 51.983,16.296 C4.1 55.705,20.048 52.347,23.406 U2.53
pads on no net: J1.3 P1.7 P1.8 P1.9 SW1.2 SW1.3 U2.1 U2.2 U2.3 U2.4 U2.5 U2.6 U2.7 U2.10 U2.11 U2.12 U2.14 U2.15 U2.16 U2.17 U2.18 U2.19 U2.20 U2.21 U2.26 U2.27 U2.28 U2.29 U2.30 U2.32 U2.33 U2.36 U2.40 U2.43 U2.44 U2.45 U2.46 U2.47 U2.48 U2.52 U2.55 U2.56 U2.60 U2.64 U2.65 U2.66 U2.67 U2.68 U2.74 U2.75 U2.78 U2.79 U2.81 U2.84 U2.87 U2.88 U2.89 U2.90 U2.95 U2.99 U2.100 U2.101 U2.102 U2.103 U2.104 U3.9 U3.10 U3.11 U3.12 U4.6 U4.8 U4.11
copper on no net: | length 1200
  Top Layer w0.254: 0,0 200,0 200,100 0,100 0,0
  Bottom Layer w0.254: 0,0 200,0 200,100 0,100 0,0

## Keep-outs
Keep-Out Layer:
  the board outline again, w0.254

## Other copper
Top Layer:
  text "Sistemas Embebidos" at 162.255,8.839 h2
  text "TP Final" at 172.034,5.537 h2
  text "Grupo 5" at 172.415,2.266 h2

## Text inside footprints (layer, text, board x,y; h text height)
C1: Top Overlay "+" at 26.975,79.985 h1.02 r180
P1: Top Overlay "2" at 9.652,60.706 h1.27 r270; Top Overlay "1" at 7.112,60.198 h1.27 r270; Top Overlay "9" at 7.112,46.482 h1.27 r270; Top Overlay "10" at 9.652,46.482 h1.27 r270
P2: Top Overlay "1" at 152.908,12.192 h1.27; Top Overlay "2" at 152.4,14.732 h1.27; Top Overlay "4" at 159.004,14.732 h1.27; Top Overlay "3" at 159.004,12.192 h1.27
U2: Top Overlay "75" at 77.193,42.534 h1.27 r135; Top Overlay "52" at 49.534,26.908 h1.27 r135; Top Overlay "26" at 21.336,41.815 h1.27 r45; Top Overlay "27" at 27.083,47.563 h1.27 r45; Top Overlay "1" at 42.978,75.132 h1.27 r315; Top Overlay "2" at 47.918,70.193 h1.27 r315; Top Overlay "25" at 20.169,54.657 h1.27 r315; Top Overlay "77" at 70.458,49.449 h1.27 r225; Top Overlay "76" at 76.205,55.196 h1.27 r225; Top Overlay "100" at 52.587,75.761 h1.27 r315